# Altium PCB XEM7310_Breakout.PcbDoc (part 1 of 3)
Units mil, origin at the board's own origin, x right, y up, seen from the top; angles counter-clockwise.
Board outline 5980 x 6510 mil, 4 copper layers (Top, Ground Plane, Power Plane, Bottom), stack 61.497 mil thick; 68 components, 204 nets, 832 pads, 382 vias.
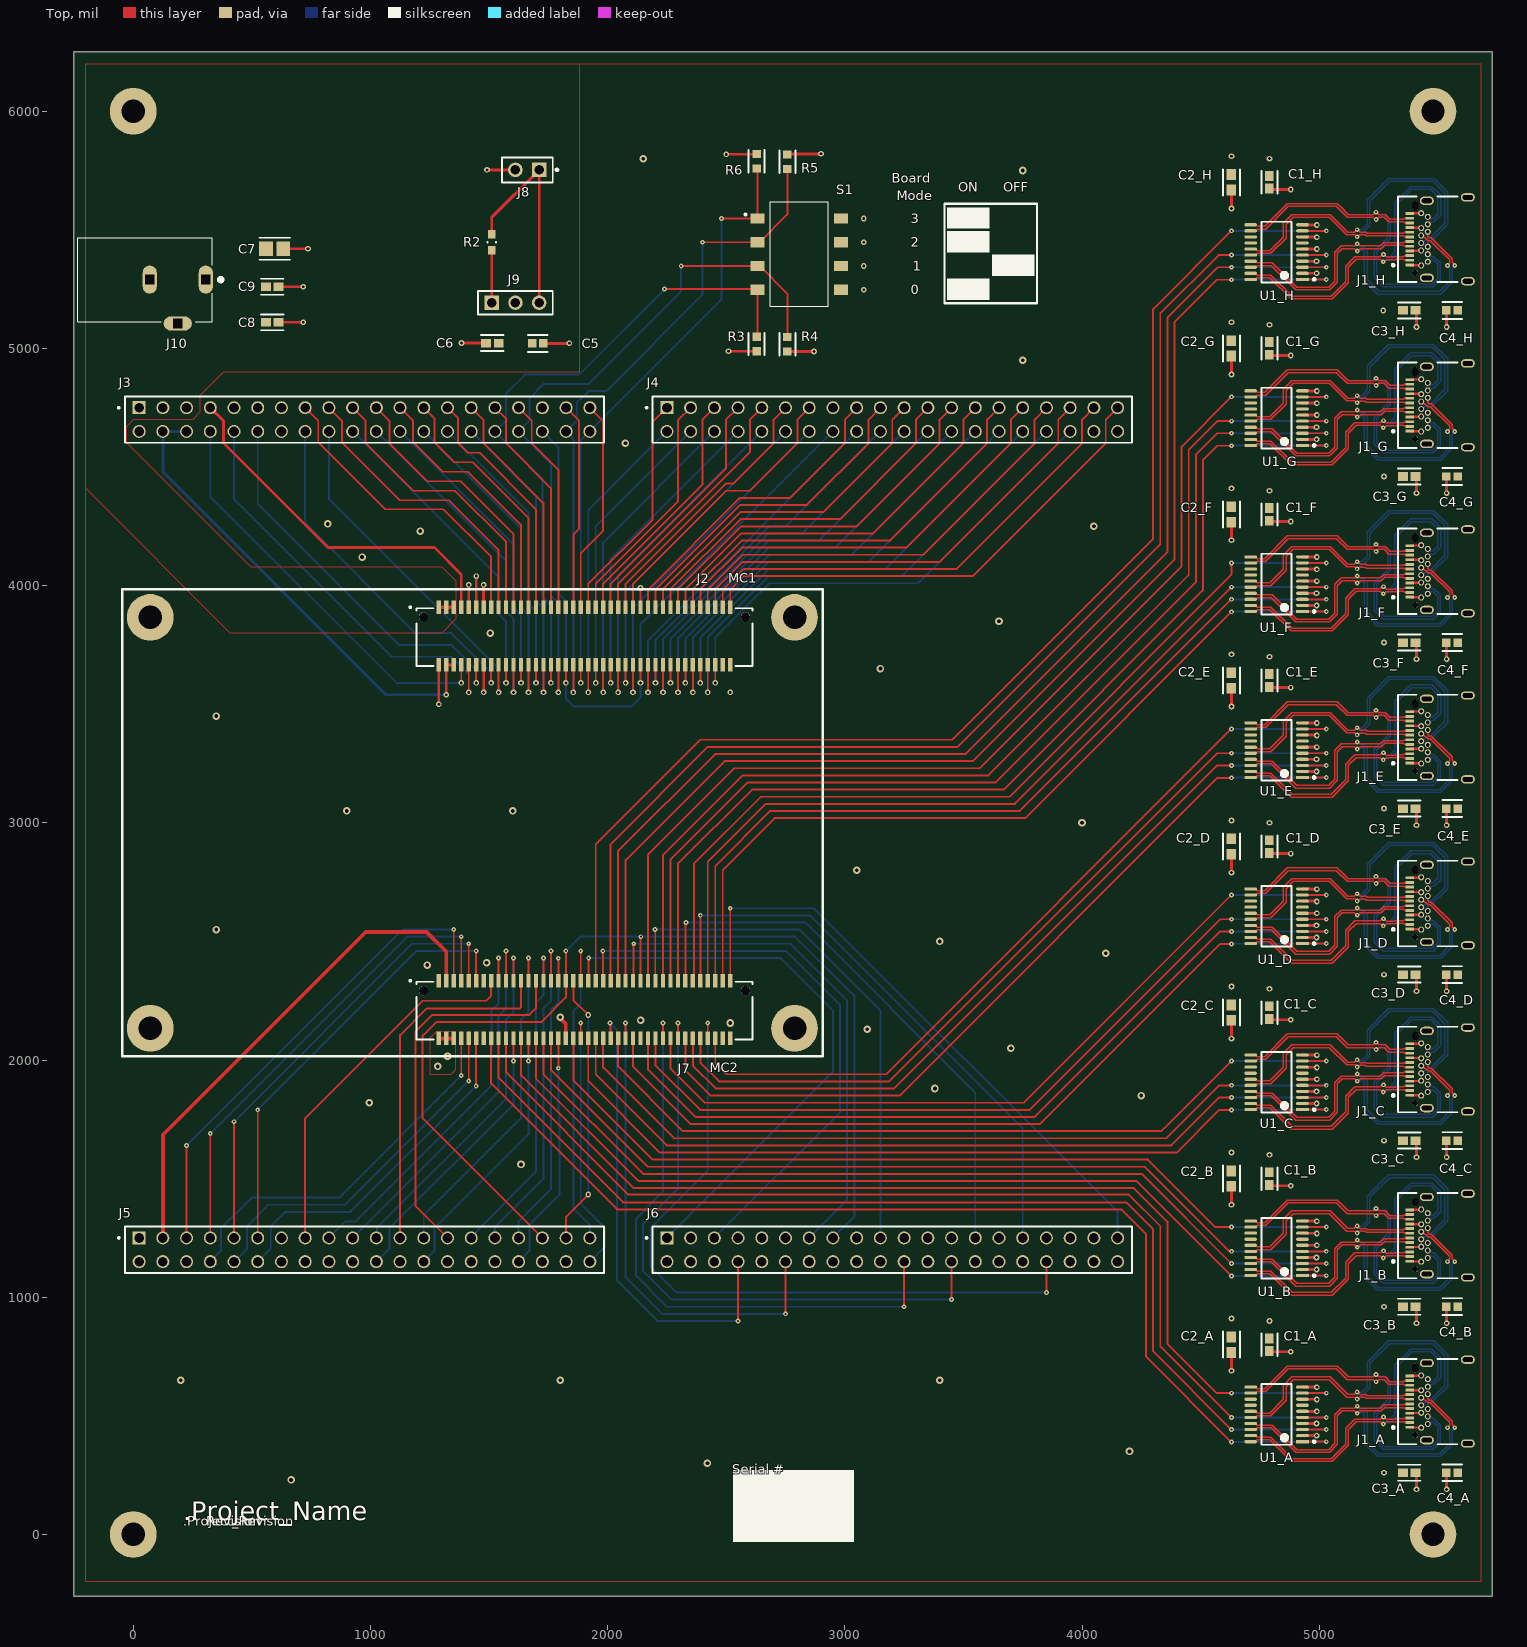
[diagram p0: Top view]
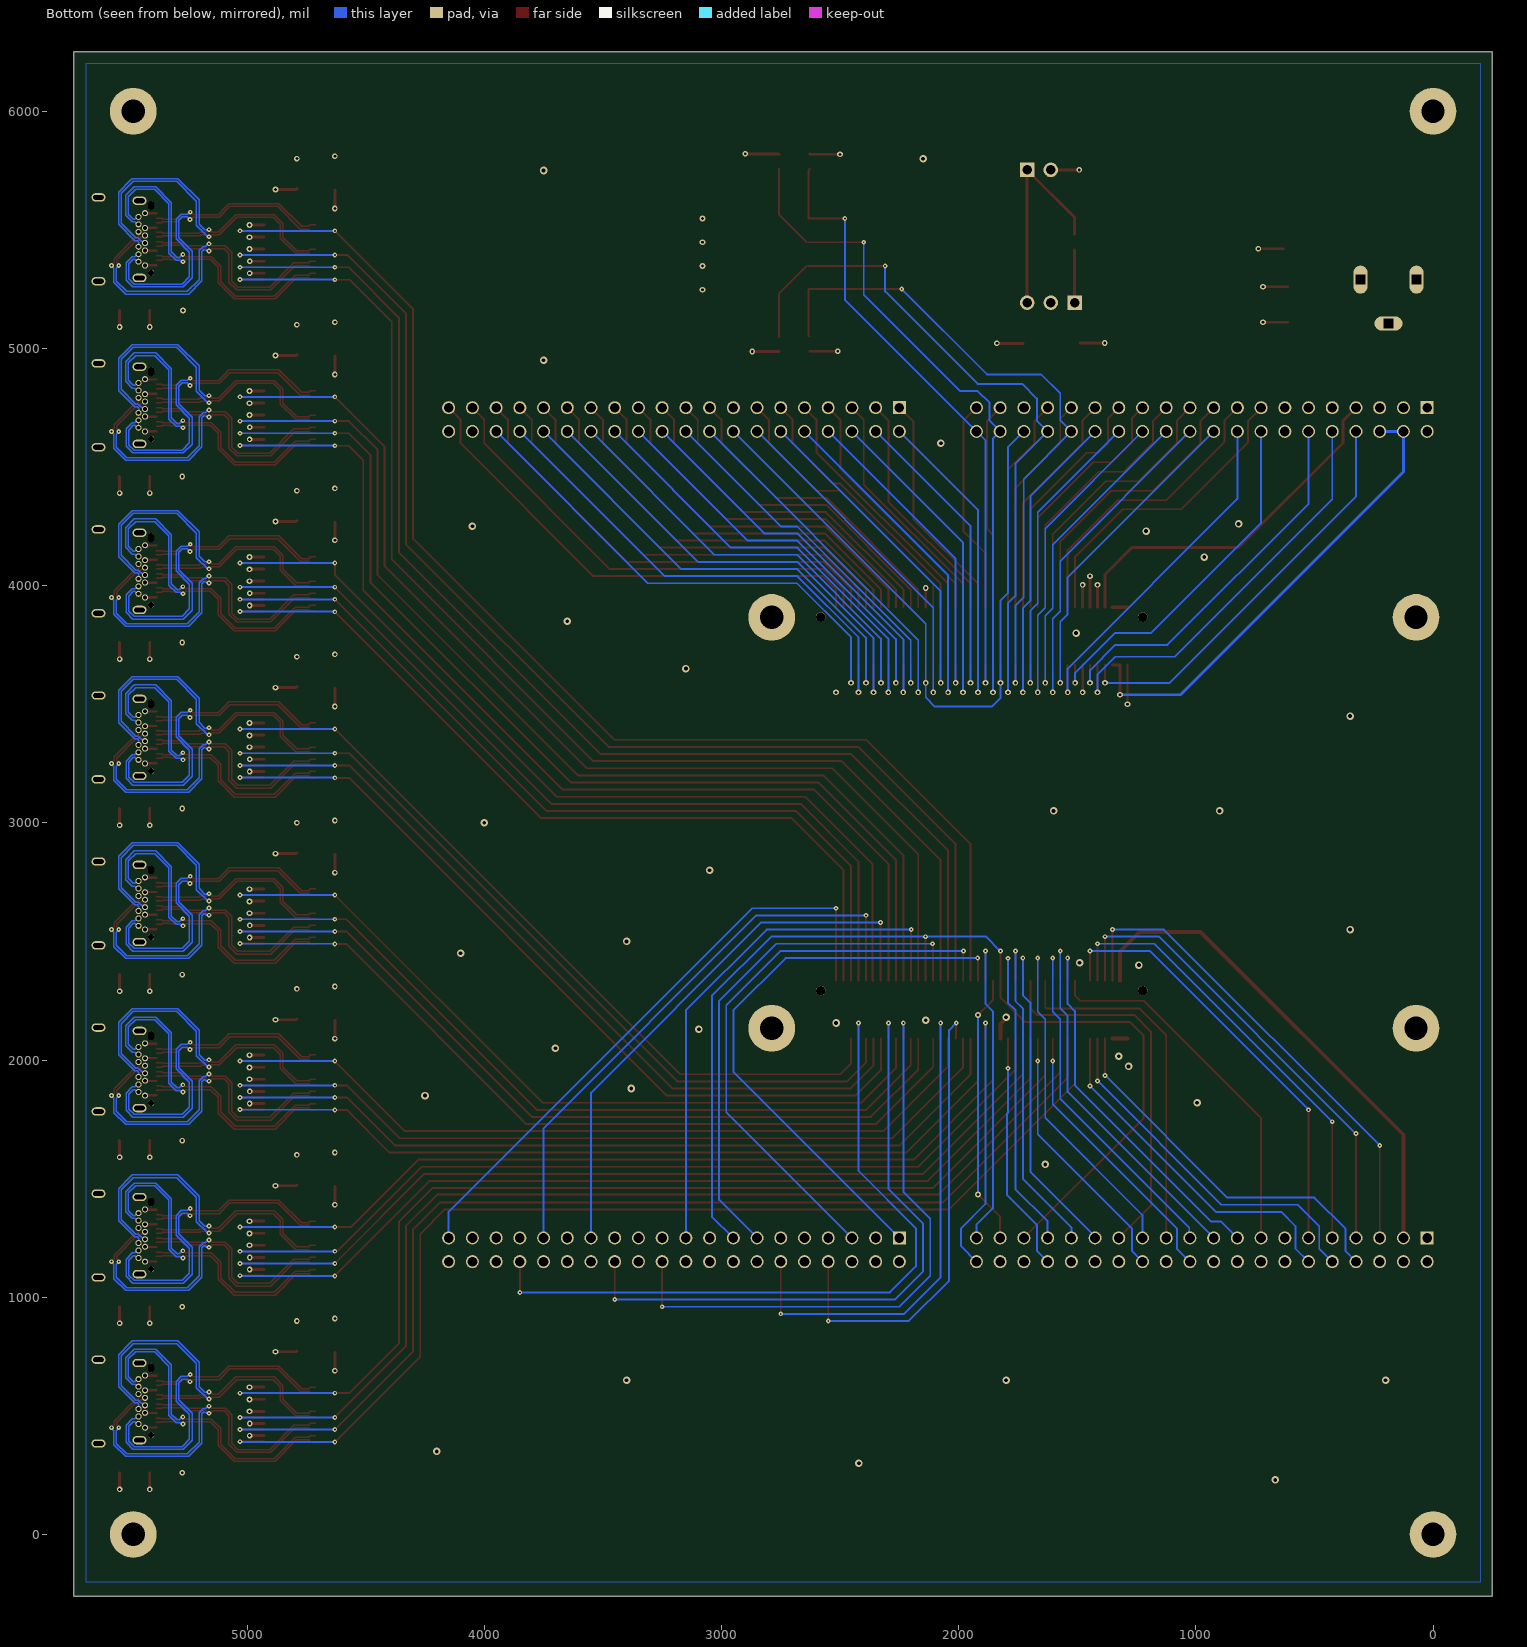
[diagram p1: Bottom view, seen from below]
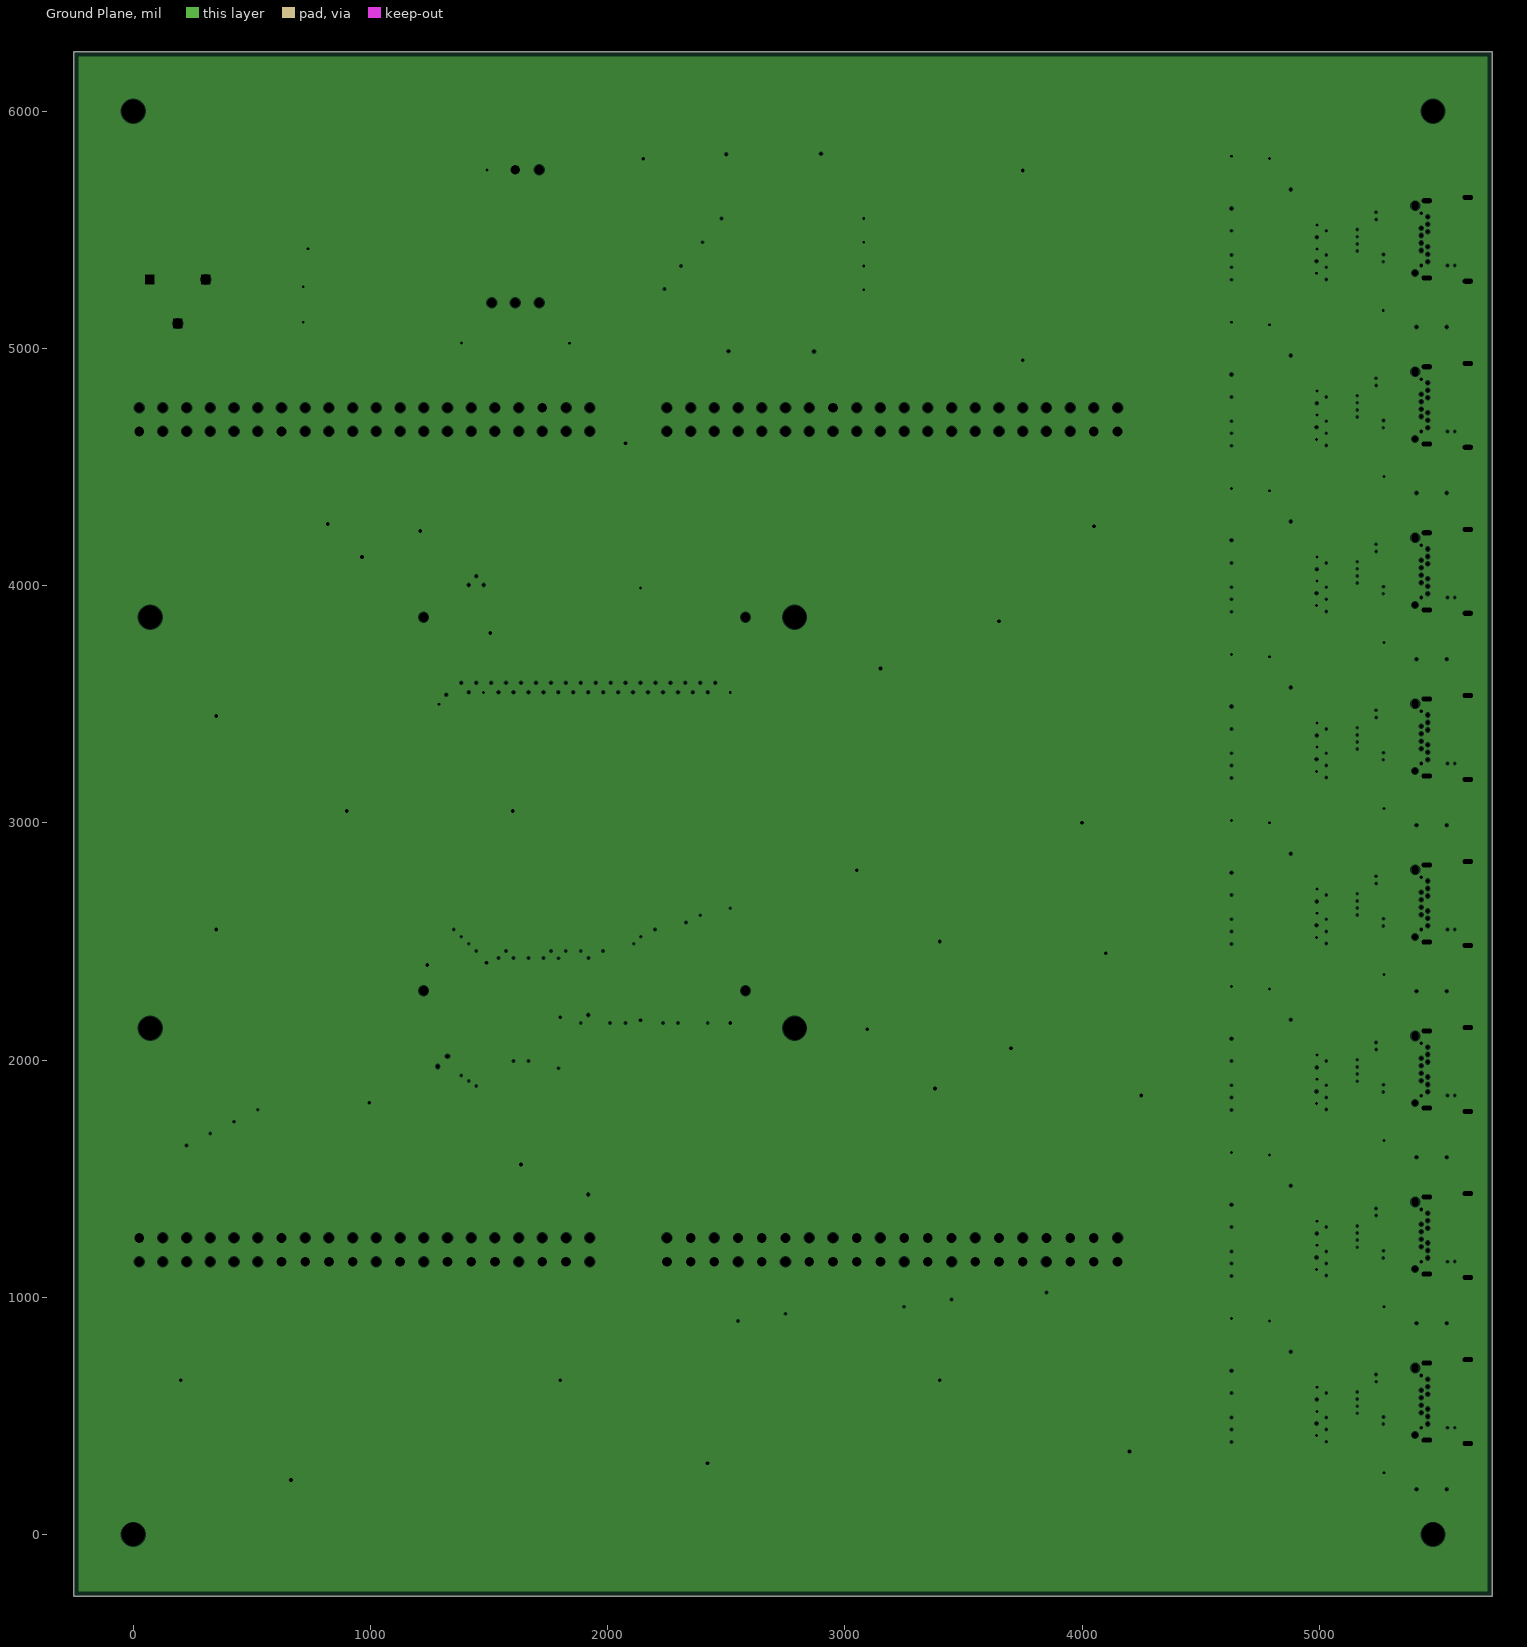
[diagram p2: Ground Plane, clearances drawn from the general rule]
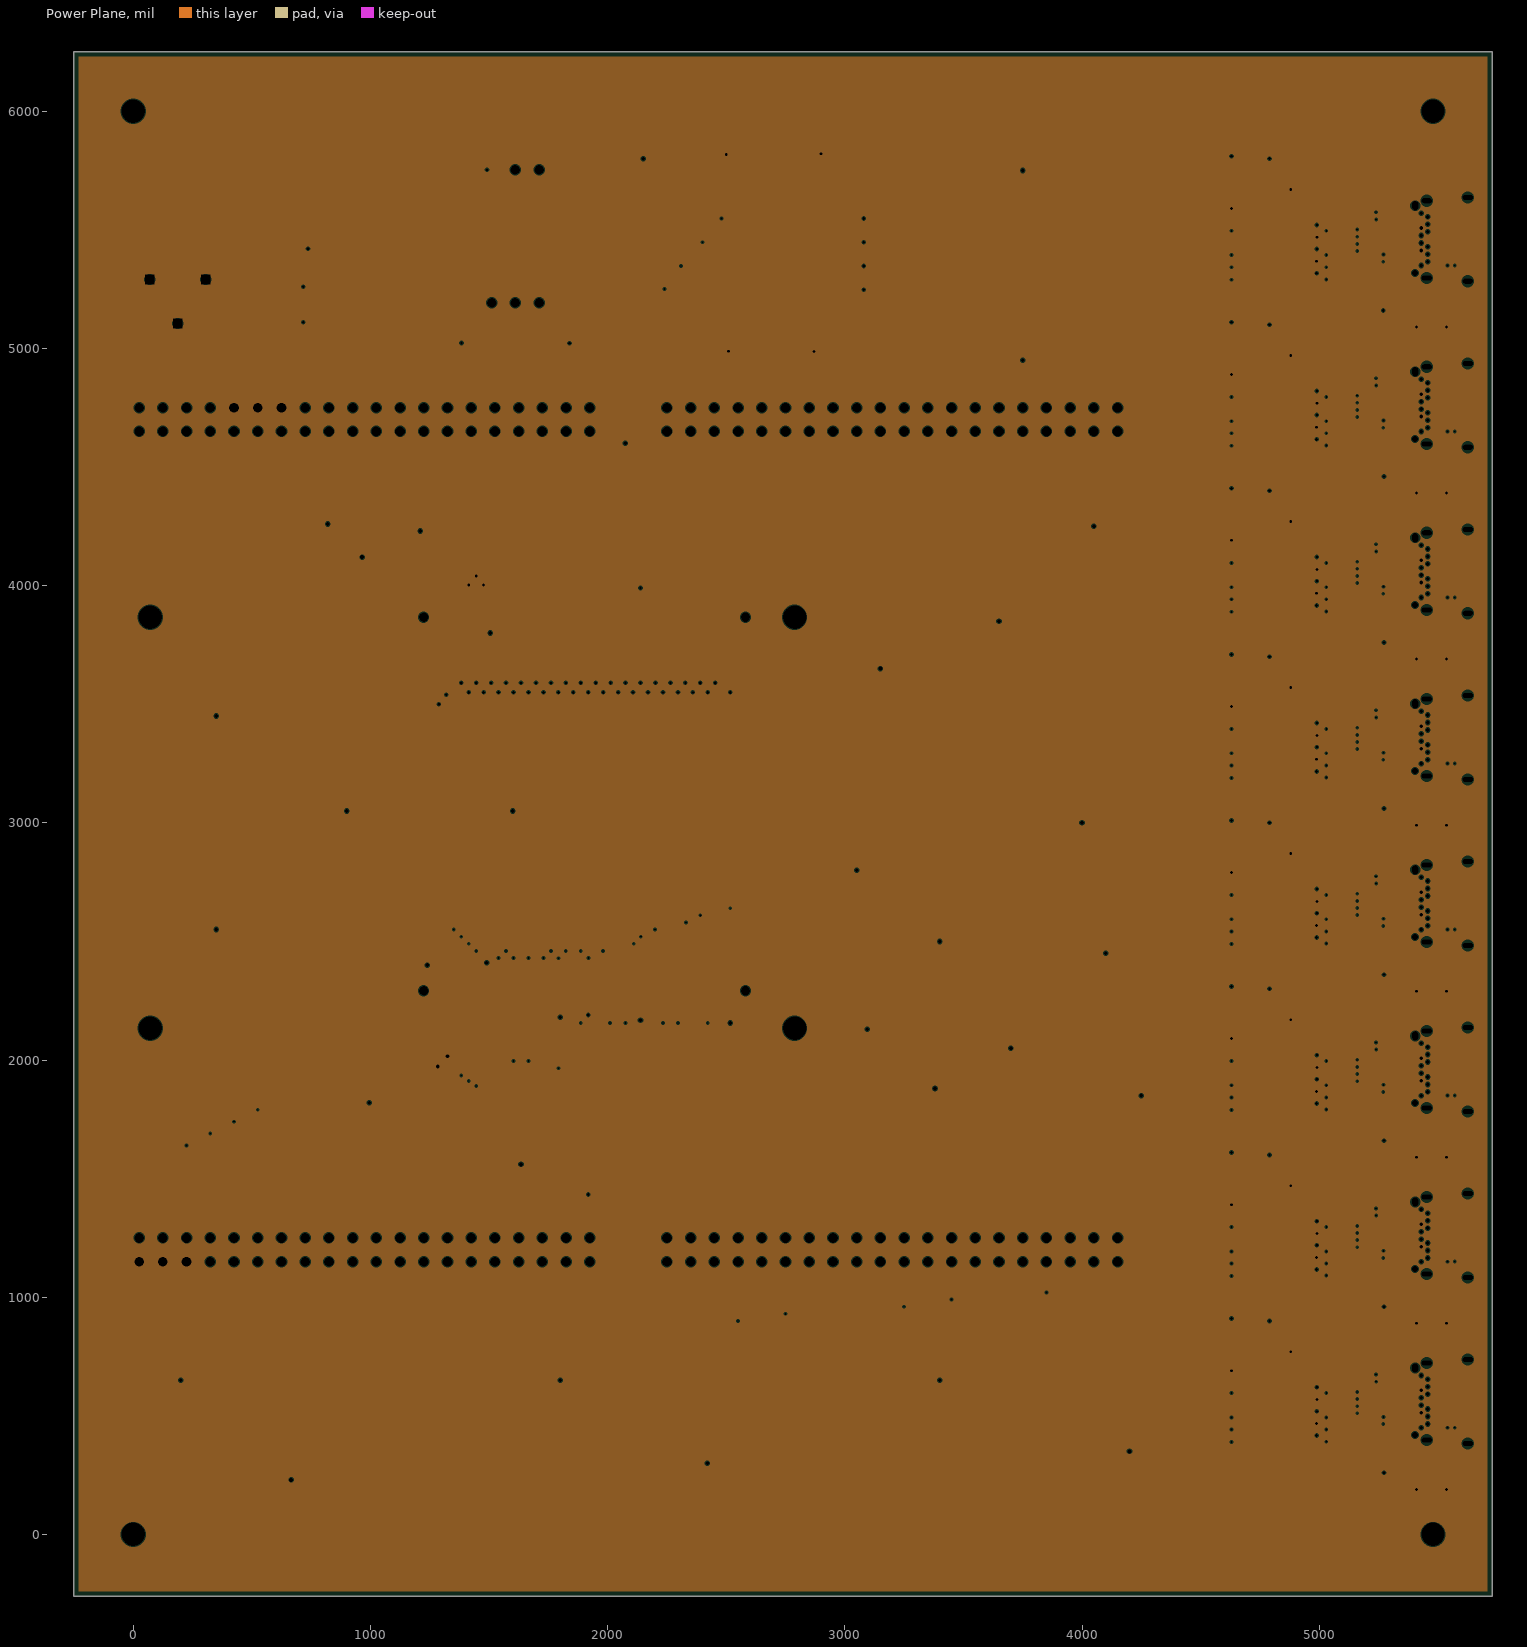
[diagram p3: Power Plane, clearances drawn from the general rule]
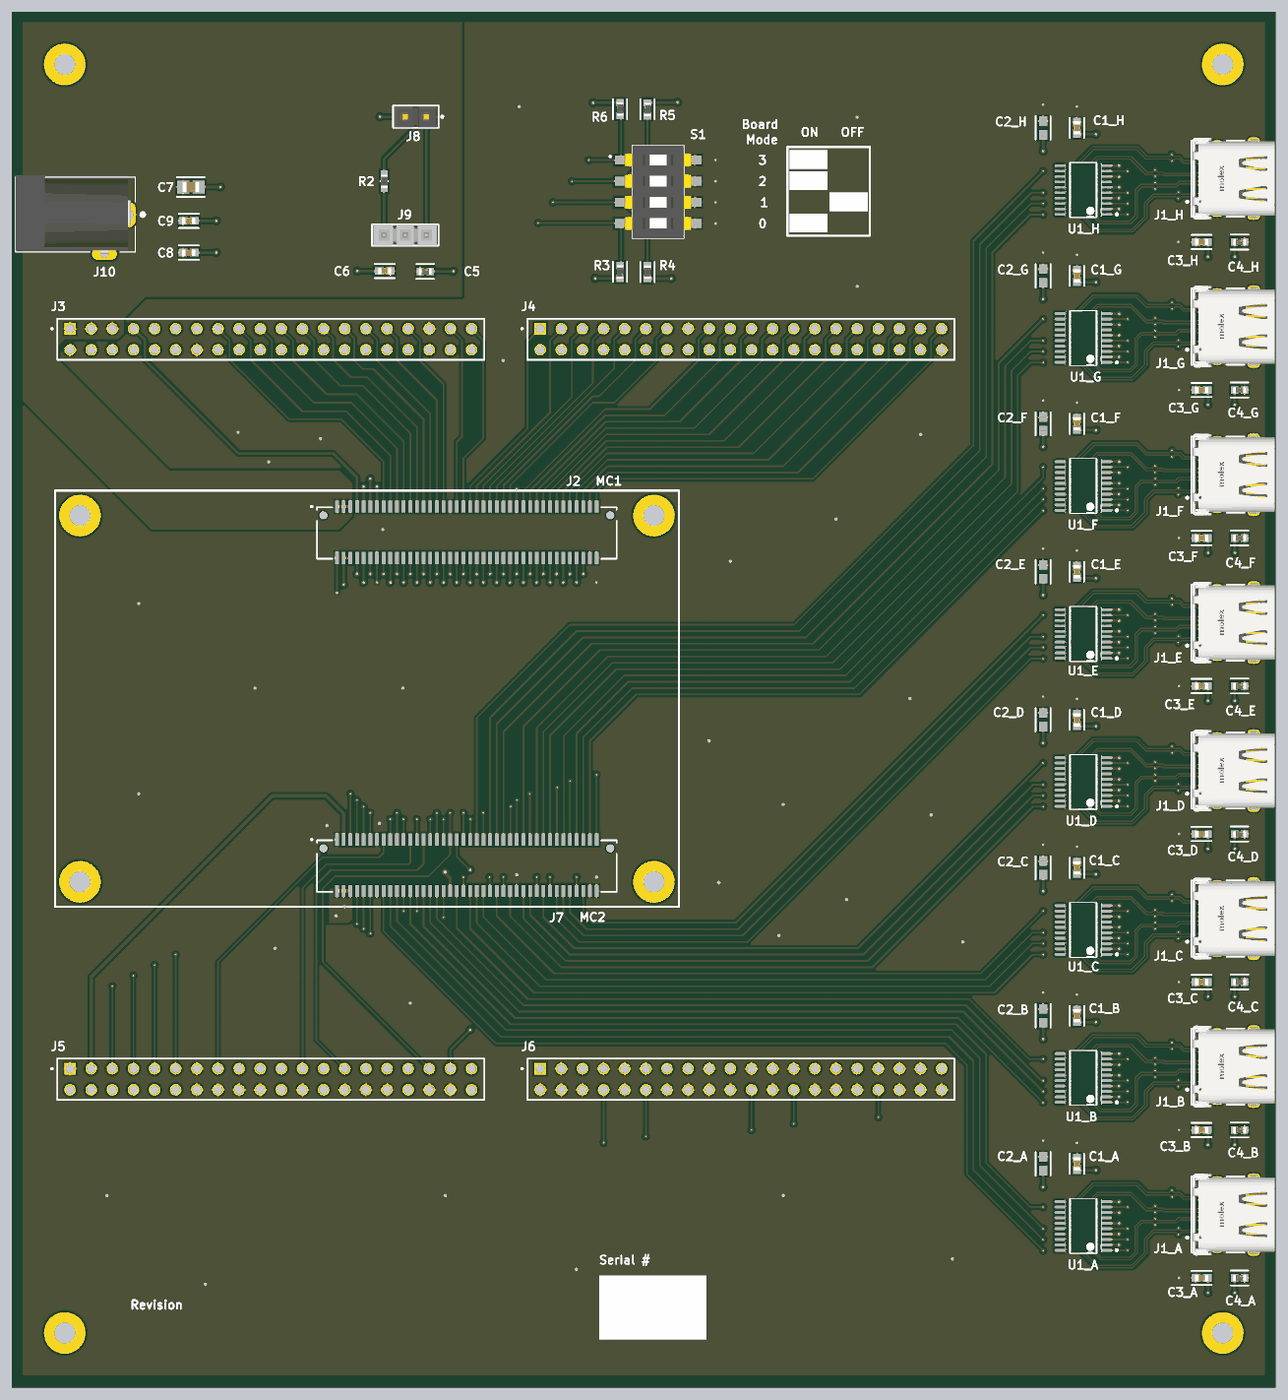
[diagram p6: 3D render of the assembled board from above, using the file's embedded part models]

## Layer stack, top to bottom
Top Solder: solder mask 0.4, Solder Resist, Dk 3.5
Top: signal copper 1.378
Dielectric 1: prepreg 7.717, FR-4, Dk 4.74
Ground Plane: plane copper 1.378, net GND
Dielectric 3: core 40.551, Dk 4.6
Power Plane: plane copper 1.378, net 3V3
Dielectric 4: prepreg 7.717, Dk 4.74
Bottom: signal copper 1.378
Bottom Solder: solder mask 0.4, Solder Resist, Dk 3.5

## Board outline
-250,6250 5730,6250 5730,-260 -250,-260

## Design rules (kind name [scope] priority, off if disabled: settings)
BoardOutlineClearance [All] p1: gap=7.87 ignorepadtopadclearanceinfootprint=FALSE
Clearance Clearance_1 [InComponentClass('USB') vs InComponentClass('USB')] p1: gap=4 ignorepadtopadclearanceinfootprint=TRUE
Clearance Diff_Clearance [InDifferentialPairClass('LVDS_SPI') vs InDifferentialPairClass('LVDS_SPI')] p2: gap=10 ignorepadtopadclearanceinfootprint=TRUE except(5: Arc-Arc Arc-Track Track-Track)
Clearance [All] p3: gap=6 ignorepadtopadclearanceinfootprint=TRUE except(10: Arc-Arc Arc-Track Arc-Fill Arc-Poly Arc-Region Track-Track Track-Fill Track-Poly Track-Region SMDPad-Fill SMDPad-Poly SMDPad-Region THPad-Fill THPad-Poly THPad-Region Via-Fill Via-Poly Via-Region Fill-Fill Fill-Poly Fill-Region Poly-Poly Poly-Region Region-Region)
ComponentClearance [All] p1: gap=10 collisioncheckmode=3 verticalgap=10 showdistances=TRUE
DiffPairsRouting [InDifferentialPairClass('LVDS_SPI')] p1: maxlimit=5 minlimit=5 mostfreqgap=5 toplayer_minwidth=6.3 toplayer_maxwidth=6.3 toplayer_prefwidth=6.3 bottomlayer_minwidth=6.3 bottomlayer_maxwidth=6.3 bottomlayer_prefwidth=6.3 impedanceprofiledriven=TRUE impedanceprofileid={1ED248B1-CE5C-4CD3-9082-4E048037D57D} impedanceprofilevalue=100.000000 maxuncoupledlength=30
Height [All] p1: minheight=0 maxheight=71497.94 prefheight=500
HoleSize [All] p1: absolutevalues=TRUE maxlimit=248.03 minlimit=7.87 maxpercent=80.000 minpercent=20.000
HoleToHoleClearance [All] p1: gap=10 allowstackedmicrovias=FALSE
Length [InDifferentialPairClass('LVDS_SPI')] p1: maxlimit=100000 minlimit=10
MinimumAnnularRing USB_TH [InComponentClass('USB')] p1: minimumring=4
MinimumAnnularRing [All] p2: minimumring=6
MinimumSolderMaskSliver MinimumSolderMaskSliver_1 [InComponentClass('USB') vs InComponentClass('USB')] p1: minsoldermaskwidth=5
MinimumSolderMaskSliver [All] p2: minsoldermaskwidth=6
PlaneClearance [All] p1: clearance=4
PlaneConnect PlaneConnectPowerPads [InPadClass('PowerPads')] p1: planeconnectstyle=Direct reliefexpansion=20 reliefentries=4 reliefconductorwidth=10 reliefairgap=10
PlaneConnect [All] p2: pad.planeconnectstyle=Relief pad.reliefexpansion=11.81 pad.reliefentries=4 pad.reliefconductorwidth=4 pad.reliefairgap=4 via.planeconnectstyle=Direct via.reliefexpansion=11.81 via.reliefentries=4 via.reliefconductorwidth=5 via.reliefairgap=5
PolygonConnect PolygonConnectPowerPads [All vs (InPadClass('PowerPads'))] p1: connectstyle=Direct reliefconductorwidth=10 reliefentries=4 polygonreliefangle="90 Angle" airgapwidth=10
PolygonConnect [All] p2: thpad.connectstyle=Relief thpad.reliefconductorwidth=10 thpad.reliefentries=4 thpad.polygonreliefangle="90 Angle" thpad.airgapwidth=8 smdpad.connectstyle=Relief smdpad.reliefconductorwidth=10 smdpad.reliefentries=4 smdpad.polygonreliefangle="90 Angle" smdpad.airgapwidth=8 via.connectstyle=Direct via.reliefconductorwidth=5 via.reliefentries=4 via.polygonreliefangle="90 Angle" via.airgapwidth=5
RoutingVias Diff_Vias [InDifferentialPairClass('LVDS_SPI')] p1: holewidth=8 width=18 viastyle="Through Hole" minholewidth=8 minwidth=18 maxholewidth=8 maxwidth=18
RoutingVias [All] p2: holewidth=12 width=24 viastyle="Through Hole" minholewidth=10 minwidth=20 maxholewidth=16 maxwidth=32
SilkToSilkClearance [All] p1: silktosilkclearance=5
SilkToSolderMaskClearance [IsPad] p1: minsilkscreentomaskgap=5 clearancetoexposedcopper=TRUE
SolderMaskExpansion [All] p1: expansion=2 istentingtop=FALSE
SupplyNets "Schematic Supply Nets_7" [InNet('1V0')] p1: voltage=0.000
SupplyNets "Schematic Supply Nets_6" [InNet('5V0')] p2: voltage=0.000
SupplyNets "Schematic Supply Nets_5" [InNet('VCCO_MC2')] p3: voltage=0.000
SupplyNets "Schematic Supply Nets_4" [InNet('VCCO_MC1')] p4: voltage=0.000
SupplyNets "Schematic Supply Nets_3" [InNet('1V8')] p5: voltage=0.000
SupplyNets "Schematic Supply Nets_2" [InNet('3V3')] p6: voltage=0.000
SupplyNets "Schematic Supply Nets_1" [InNet('GND')] p7: voltage=0.000
UnRoutedNet [All] p1: checkbadconnections=TRUE
Width 5V0_Width [InNet('5V0')] p1: maxlimit=100 minlimit=10 preferedwidth=20 minimp=50.000000 maximp=50.000000 favimp=50.000000
Width General [InNetClass('SE_Signals')] p2: maxlimit=20 minlimit=5 preferedwidth=8 minimp=50.000000 maximp=50.000000 favimp=50.000000
Width 3V3_Width [InNet('3V3')] p3: maxlimit=100 minlimit=10 preferedwidth=20
Width GND_Width [InNet('GND')] p4: maxlimit=100 minlimit=10 preferedwidth=20 minimp=50.000000 maximp=50.000000 favimp=50.000000
19 further rules are at their usual default settings.

## Classes and differential pairs
component class USB: J1_A J1_B J1_C J1_D J1_E J1_F J1_G J1_H
net class USB_TH: 3V3 C\S\_A_N C\S\_A_P C\S\_B_N C\S\_B_P C\S\_C_N C\S\_C_P C\S\_D_N C\S\_D_P C\S\_E_N C\S\_E_P C\S\_F_N C\S\_F_P C\S\_G_N C\S\_G_P C\S\_H_N C\S\_H_P GND MISO_A_N MISO_A_P MISO_B_N MISO_B_P MISO_C_N MISO_C_P MISO_D_N MISO_D_P MISO_E_N MISO_E_P MISO_F_N MISO_F_P MISO_G_N MISO_G_P MISO_H_N MISO_H_P MOSI_A_N MOSI_A_P MOSI_B_N MOSI_B_P MOSI_C_N MOSI_C_P MOSI_D_N MOSI_D_P MOSI_E_N MOSI_E_P MOSI_F_N MOSI_F_P MOSI_G_N MOSI_G_P MOSI_H_N MOSI_H_P SCLK_A_N SCLK_A_P SCLK_B_N SCLK_B_P SCLK_C_N SCLK_C_P SCLK_D_N SCLK_D_P SCLK_E_N SCLK_E_P SCLK_F_N SCLK_F_P SCLK_G_N SCLK_G_P SCLK_H_N SCLK_H_P
net class SE_Signals: board_mode_0 board_mode_1 board_mode_2 board_mode_3 C\S\_A C\S\_B C\S\_C C\S\_D C\S\_E C\S\_F C\S\_G C\S\_H FPGA_TCK FPGA_TDI FPGA_TDO FPGA_TMS MC1_15 MC1_16 MC1_17 MC1_18 MC1_19 MC1_20 MC1_21 MC1_22 MC1_23 MC1_24 MC1_25 MC1_26 MC1_27 MC1_28 MC1_29 MC1_30 MC1_31 MC1_33 MC1_37 MC1_39 MC1_41 MC1_42 MC1_43 MC1_44 MC1_45 MC1_46 MC1_47 MC1_48 MC1_49 MC1_50 MC1_51 MC1_52 MC1_53 MC1_54 MC1_57 MC1_58 MC1_59 MC1_60 MC1_61 MC1_62 MC1_63 MC1_64 MC1_65 MC1_66 MC1_67 MC1_68 MC1_69 MC1_70 MC1_72 MC1_74 MC1_76 MC1_77 MC1_79 MC2_10 MC2_12 MC2_15 MC2_17 MC2_19 MC2_21 MC2_22 MC2_23 MC2_25 MC2_27 MC2_29 MC2_31 MC2_33 MC2_34 MC2_37 MC2_39 MC2_45 MC2_48 MC2_59 MC2_62 MC2_71 MC2_74 MISO_A2 MISO_B2 MISO_C2 MISO_D2 MISO_E2 MISO_F2 MISO_G2 MISO_H2 MOSI_A MOSI_B MOSI_C MOSI_D MOSI_E MOSI_F MOSI_G MOSI_H NetJ8_1 NetJ9_1 SCLK_A SCLK_B SCLK_C SCLK_D SCLK_E SCLK_F SCLK_G SCLK_H status_led_1 status_led_2 status_led_3 SYS_CLK_MC1 SYS_CLK_MC2 XADC_VN XADC_VP
differential pair class LVDS_SPI: C\S\_A C\S\_B C\S\_C C\S\_D C\S\_E C\S\_F C\S\_G C\S\_H MISO_A MISO_B MISO_C MISO_D MISO_E MISO_F MISO_G MISO_H MOSI_A MOSI_B MOSI_C MOSI_D MOSI_E MOSI_F MOSI_G MOSI_H SCLK_A SCLK_B SCLK_C SCLK_D SCLK_E SCLK_F SCLK_G SCLK_H
channel class Intan_Interface: A B C D E F G H
component class U_Onboard_IO: C5 C6 C7 C8 C9 J8 J9 J10 R2 R3 R4 R5 R6 S1
component class U_FPGA: J2 J3 J4 J5 J6 J7
component class H: C1_H C2_H C3_H C4_H J1_H U1_H
component class G: C1_G C2_G C3_G C4_G J1_G U1_G
component class F: C1_F C2_F C3_F C4_F J1_F U1_F
component class E: C1_E C2_E C3_E C4_E J1_E U1_E
component class D: C1_D C2_D C3_D C4_D J1_D U1_D
component class C: C1_C C2_C C3_C C4_C J1_C U1_C
component class B: C1_B C2_B C3_B C4_B J1_B U1_B
component class A: C1_A C2_A C3_A C4_A J1_A U1_A
differential pair SCLK_H: +SCLK_H_P -SCLK_H_N
differential pair SCLK_G: +SCLK_G_P -SCLK_G_N
differential pair SCLK_F: +SCLK_F_P -SCLK_F_N
differential pair SCLK_E: +SCLK_E_P -SCLK_E_N
differential pair SCLK_D: +SCLK_D_P -SCLK_D_N
differential pair SCLK_C: +SCLK_C_P -SCLK_C_N
differential pair SCLK_B: +SCLK_B_P -SCLK_B_N
differential pair SCLK_A: +SCLK_A_P -SCLK_A_N
differential pair MOSI_H: +MOSI_H_P -MOSI_H_N
differential pair MOSI_G: +MOSI_G_P -MOSI_G_N
differential pair MOSI_F: +MOSI_F_P -MOSI_F_N
differential pair MOSI_E: +MOSI_E_P -MOSI_E_N
differential pair MOSI_D: +MOSI_D_P -MOSI_D_N
differential pair MOSI_C: +MOSI_C_P -MOSI_C_N
differential pair MOSI_B: +MOSI_B_P -MOSI_B_N
differential pair MOSI_A: +MOSI_A_P -MOSI_A_N
differential pair MISO_H: +MISO_H_P -MISO_H_N
differential pair MISO_G: +MISO_G_P -MISO_G_N
differential pair MISO_F: +MISO_F_P -MISO_F_N
differential pair MISO_E: +MISO_E_P -MISO_E_N
differential pair MISO_D: +MISO_D_P -MISO_D_N
differential pair MISO_C: +MISO_C_P -MISO_C_N
differential pair MISO_B: +MISO_B_P -MISO_B_N
differential pair MISO_A: +MISO_A_P -MISO_A_N
differential pair C\S\_H: +C\S\_H_P -C\S\_H_N
differential pair C\S\_G: +C\S\_G_P -C\S\_G_N
differential pair C\S\_F: +C\S\_F_P -C\S\_F_N
differential pair C\S\_E: +C\S\_E_P -C\S\_E_N
differential pair C\S\_D: +C\S\_D_P -C\S\_D_N
differential pair C\S\_C: +C\S\_C_P -C\S\_C_N
differential pair C\S\_B: +C\S\_B_P -C\S\_B_N
differential pair C\S\_A: +C\S\_A_P -C\S\_A_N

## Components (designator, comment, footprint, x,y, rotation, side; value= is the part's Value field where it differs from the comment)
C1_A "0.1uF" FP-CC0603-DA-IPC_B 4790,800 r90 top value="100 nF" (schematic designator C1)
C1_B "0.1uF" FP-CC0603-DA-IPC_B 4790,1500 r90 top value="100 nF" (schematic designator C1)
C1_C "0.1uF" FP-CC0603-DA-IPC_B 4790,2200 r90 top value="100 nF" (schematic designator C1)
C1_D "0.1uF" FP-CC0603-DA-IPC_B 4790,2900 r90 top value="100 nF" (schematic designator C1)
C1_E "0.1uF" FP-CC0603-DA-IPC_B 4790,3600 r90 top value="100 nF" (schematic designator C1)
C1_F "0.1uF" FP-CC0603-DA-IPC_B 4790,4300 r90 top value="100 nF" (schematic designator C1)
C1_G "0.1uF" FP-CC0603-DA-IPC_B 4790,5000 r90 top value="100 nF" (schematic designator C1)
C1_H "0.1uF" FP-CC0603-DA-IPC_B 4790,5700 r90 top value="100 nF" (schematic designator C1)
C2_A "1nF" FP-CL10-IPC_A 4630,800 r270 top (schematic designator C2)
C2_B "1nF" FP-CL10-IPC_A 4630,1500 r270 top (schematic designator C2)
C2_C "1nF" FP-CL10-IPC_A 4630,2200 r270 top (schematic designator C2)
C2_D "1nF" FP-CL10-IPC_A 4630,2900 r270 top (schematic designator C2)
C2_E "1nF" FP-CL10-IPC_A 4630,3600 r270 top (schematic designator C2)
C2_F "1nF" FP-CL10-IPC_A 4630,4300 r270 top (schematic designator C2)
C2_G "1nF" FP-CL10-IPC_A 4630,5000 r270 top (schematic designator C2)
C2_H "1nF" FP-CL10-IPC_A 4630,5700 r270 top (schematic designator C2)
C3_A "0.1uF" FP-CC0603-DA-IPC_B 5380,260 r180 top value="100 nF" (schematic designator C3)
C3_B "0.1uF" FP-CC0603-DA-IPC_B 5380,960 r180 top value="100 nF" (schematic designator C3)
C3_C "0.1uF" FP-CC0603-DA-IPC_B 5380,1660 r180 top value="100 nF" (schematic designator C3)
C3_D "0.1uF" FP-CC0603-DA-IPC_B 5380,2360 r180 top value="100 nF" (schematic designator C3)
C3_E "0.1uF" FP-CC0603-DA-IPC_B 5380,3060 r180 top value="100 nF" (schematic designator C3)
C3_F "0.1uF" FP-CC0603-DA-IPC_B 5380,3760 r180 top value="100 nF" (schematic designator C3)
C3_G "0.1uF" FP-CC0603-DA-IPC_B 5380,4460 r180 top value="100 nF" (schematic designator C3)
C3_H "0.1uF" FP-CC0603-DA-IPC_B 5380,5160 r180 top value="100 nF" (schematic designator C3)
C4_A "10 uF" FP-GRM188-0_2-IPC_C 5560,260 r0 top (schematic designator C4)
C4_B "10 uF" FP-GRM188-0_2-IPC_C 5560,960 r0 top (schematic designator C4)
C4_C "10 uF" FP-GRM188-0_2-IPC_C 5560,1660 r0 top (schematic designator C4)
C4_D "10 uF" FP-GRM188-0_2-IPC_C 5560,2360 r0 top (schematic designator C4)
C4_E "10 uF" FP-GRM188-0_2-IPC_C 5560,3060 r0 top (schematic designator C4)
C4_F "10 uF" FP-GRM188-0_2-IPC_C 5560,3760 r0 top (schematic designator C4)
C4_G "10 uF" FP-GRM188-0_2-IPC_C 5560,4460 r0 top (schematic designator C4)
C4_H "10 uF" FP-GRM188-0_2-IPC_C 5560,5160 r0 top (schematic designator C4)
C5 "10 uF" FP-GRM188-0_2-IPC_C 1705.81,5020.81 r0 top
C6 "0.1uF" FP-CC0603-DA-IPC_B 1514.16,5022.51 r180 top value="100 nF"
C7 "22uF" FP-GRM21B-0_2-e0_2_0_7-IPC_A 596.45,5420 r0 top
C8 "1uF" FP-CC0603-DA-IPC_B 586.65,5110 r0 top value="1 uF"
C9 "0.1uF" FP-CC0603-DA-IPC_B 586.65,5260 r0 top value="100 nF"
J1_A "217183-0001" FP-217183-0001-MFG 5531.81,560 r90 top locked (schematic designator J1)
J1_B "217183-0001" FP-217183-0001-MFG 5531.81,1260 r90 top locked (schematic designator J1)
J1_C "217183-0001" FP-217183-0001-MFG 5531.81,1960 r90 top locked (schematic designator J1)
J1_D "217183-0001" FP-217183-0001-MFG 5531.81,2660 r90 top locked (schematic designator J1)
J1_E "217183-0001" FP-217183-0001-MFG 5531.81,3360 r90 top locked (schematic designator J1)
J1_F "217183-0001" FP-217183-0001-MFG 5531.81,4060 r90 top locked (schematic designator J1)
J1_G "217183-0001" FP-217183-0001-MFG 5531.81,4760 r90 top locked (schematic designator J1)
J1_H "217183-0001" FP-217183-0001-MFG 5531.81,5460 r90 top locked (schematic designator J1)
J2 "BTE-040-01-F-D-A" SAMTEC_BTE-040-01-F-D-A 1902.64,3787.32 r0 top locked
J3 "SSW-120-01-F-D" SAMTEC_SSW-120-01-F-D 25,4750 r180 top locked
J4 "SSW-120-01-F-D" SAMTEC_SSW-120-01-F-D 2250,4750 r180 top
J5 "SSW-120-01-F-D" SAMTEC_SSW-120-01-F-D 25,1250 r180 top locked
J6 "SSW-120-01-F-D" SAMTEC_SSW-120-01-F-D 2250,1250 r180 top locked
J7 "BTE-040-01-F-D-A" SAMTEC_BTE-040-01-F-D-A 1902.64,2212.52 r0 top locked
J8 "TSW-102-07-F-S" FP-TSW-102-07-F-S-MFG 1661.49,5752.67 r180 top
J9 "TSW-103-07-F-S" SMTC-TSW-103-07-X-S 1511.49,5192.67 r0 top
J10 "PJ-102AH" CUI_PJ-102AH 50,5290 r180 top
R2 "0R" FP-RC0603-MFG 1511.49,5447.67 r90 top value=0Ω
R3 "10K0" FP-RC0603-0_55-IPC_B 2627.82,5018.61 r270 top
R4 "10K0" FP-RC0603-0_55-IPC_B 2757.82,5017.6 r270 top
R5 "10K0" FP-RC0603-0_55-IPC_B 2757.82,5787.6 r90 top
R6 "10K0" FP-RC0603-0_55-IPC_B 2627.82,5788.61 r90 top
S1 "DS04-254-2-04BK-SMT-TR" SW_DS04-254-2-04BK-SMT-TR 2807.82,5397.6 r0 top
U1_A "SN65LVDT41PW" FP-PW0020A-IPC_C 4820,506.12 r180 top (schematic designator U1)
U1_B "SN65LVDT41PW" FP-PW0020A-IPC_C 4820,1206.12 r180 top locked (schematic designator U1)
U1_C "SN65LVDT41PW" FP-PW0020A-IPC_C 4820,1906.12 r180 top locked (schematic designator U1)
U1_D "SN65LVDT41PW" FP-PW0020A-IPC_C 4820,2606.12 r180 top locked (schematic designator U1)
U1_E "SN65LVDT41PW" FP-PW0020A-IPC_C 4820,3306.12 r180 top locked (schematic designator U1)
U1_F "SN65LVDT41PW" FP-PW0020A-IPC_C 4820,4006.12 r180 top locked (schematic designator U1)
U1_G "SN65LVDT41PW" FP-PW0020A-IPC_C 4820,4706.12 r180 top locked (schematic designator U1)
U1_H "SN65LVDT41PW" FP-PW0020A-IPC_C 4820,5406.12 r180 top locked (schematic designator U1)

## Footprints (in the part's own frame and the unit in brackets; to place one, negate y for a bottom-side part, rotate by r counter-clockwise, add the part's x,y. Pads: shape width x height; smd on the part's side, far side on the other; paste and mask are expansions set on the pad)
CUI_PJ-102AH [mm]
  oval 1.508x3.016 hole 1 square: 1(-6.5,0) 2(-0.5,0)
  oval 3.016x1.508 hole 1 square: 3(-3.5,4.7)
  silkscreen extent -8.3,-4.5 7.2,4.5, body extent -7.2,-4.7 7.2,4.7, height 4.5
FP-217183-0001-MFG [mm]
  rrect100% 0.9x1.5 hole 1.1 slot 0.5 at 0 deg paste-2539.97 mask+0: 1(-4.13,1.985) 2(4.13,1.985) 3(-4.49,-2.405) 4(4.49,-2.405)
  rect 0.3x0.9 smd paste+0 mask+0.025: A1(-2.75,3.795) A2(-2.25,3.795) A3(-1.75,3.795) A4(-1.25,3.795) A5(-0.75,3.795) A6(-0.25,3.795) A7(0.25,3.795) A8(0.75,3.795) A9(1.25,3.795) A10(1.75,3.795) A11(2.25,3.795) A12(2.75,3.795)
  round 0.65 hole 0.4 paste-2539.97 mask+0: B1(2.8,2.585) B2(2.4,1.885) B3(1.6,1.885) B4(1.2,2.585) B5(0.8,1.885) B6(0.4,2.585) B7(-0.4,2.585) B8(-0.8,1.885) B9(-1.2,2.585) B10(-1.6,1.885) B11(-2.4,1.885) B12(-2.8,2.585)
  round 0.65 hole 0.65 unplated paste-2539.97 mask+0: ""(-3.6,3.235)
  rrect100% 0.95x0.65 hole 0.65 slot 0.95 at 0 deg unplated paste-2539.97 mask+0: ""(3.6,3.235)
  silkscreen extent -4.57,-1.28 4.57,5.71, body extent -5.04,-5.19 5.04,5.19, height 0.25
FP-CC0603-DA-IPC_B [mil]
  rect 41.66x35.91 smd paste+0: 1(-26.65,0) 2(26.65,0)
  silkscreen extent -47,-34 47,34, body extent -57,-28 57,28, height 10
FP-CL10-IPC_A [mil]
  rect 45.6x39.85 smd paste+0: 1(-32.56,0) 2(32.56,0)
  silkscreen extent -55,-36 55,36, body extent -75,-40 75,40, height 10
FP-GRM21B-0_2-e0_2_0_7-IPC_A [mil]
  rect 57.27x61.27 smd paste+0: 1(-36.45,0) 2(36.45,0)
  silkscreen extent -65,-46 65,46, body extent -85,-50 85,50, height 10
FP-GRM188-0_2-IPC_C [mil]
  rect 35.63x35.68 smd paste+0: 1(-23.64,0) 2(23.64,0)
  silkscreen extent -41,-35 41,35, body extent -45,-24 45,24, height 10
FP-PW0020A-IPC_C [mm]
  rect 1.355x0.341 smd paste+0: 1(-2.775,2.925)
  rrect100% 1.355x0.341 smd paste+0: 2(-2.775,2.275) 3(-2.775,1.625) 4(-2.775,0.975) 5(-2.775,0.325) 6(-2.775,-0.325) 7(-2.775,-0.975) 8(-2.775,-1.625) 9(-2.775,-2.275) 10(-2.775,-2.925) 11(2.775,-2.925) 12(2.775,-2.275) 13(2.775,-1.625) 14(2.775,-0.975) 15(2.775,-0.325) 16(2.775,0.325) 17(2.775,0.975) 18(2.775,1.625) 19(2.775,2.275) 20(2.775,2.925)
  silkscreen extent -4.15,-3.25 1.6,3.25, body extent -3.55,-3.35 3.55,3.35, height 0.25
FP-RC0603-0_55-IPC_B [mil]
  rect 33.81x35.91 smd paste+0: 1(-30.58,0) 2(30.58,0)
  silkscreen extent -47,-34 47,34, body extent -57,-28 57,28, height 10
FP-RC0603-MFG [mm]
  rect 0.9x0.8 smd paste+0: 1(-0.85,0) 2(0.85,0)
  silkscreen extent -0.03,-0.45 0.03,0.45, body extent -1.4,-0.55 1.4,0.55, height 0.25
FP-TSW-102-07-F-S-MFG [mm]
  rect 1.57x1.57 hole 1.02 paste-2539.97 mask+0: 1(-1.27,0)
  round 1.57 hole 1.02 paste-2539.97 mask+0: 2(1.27,0)
  silkscreen extent -3.3,-1.34 2.73,1.34, body extent -2.83,-1.44 2.83,1.44, height 0.25
SAMTEC_BTE-040-01-F-D-A [mm]
  rect 0.457x1.44 smd: 01(-15.6,3.086) 02(-15.6,-3.086) 03(-14.8,3.086) 04(-14.8,-3.086) 05(-14,3.086) 06(-14,-3.086) 07(-13.2,3.086) 08(-13.2,-3.086) 09(-12.4,3.086) 10(-12.4,-3.086) 11(-11.6,3.086) 12(-11.6,-3.086) 13(-10.8,3.086) 14(-10.8,-3.086) 15(-10,3.086) 16(-10,-3.086) 17(-9.2,3.086) 18(-9.2,-3.086) 19(-8.4,3.086) 20(-8.4,-3.086) 21(-7.6,3.086) 22(-7.6,-3.086) 23(-6.8,3.086) 24(-6.8,-3.086) 25(-6,3.086) 26(-6,-3.086) 27(-5.2,3.086) 28(-5.2,-3.086) 29(-4.4,3.086) 30(-4.4,-3.086) 31(-3.6,3.086) 32(-3.6,-3.086) 33(-2.8,3.086) 34(-2.8,-3.086) 35(-2,3.086) 36(-2,-3.086) 37(-1.2,3.086) 38(-1.2,-3.086) 39(-0.4,3.086) 40(-0.4,-3.086) 41(0.4,3.086) 42(0.4,-3.086) 43(1.2,3.086) 44(1.2,-3.086) 45(2,3.086) 46(2,-3.086) 47(2.8,3.086) 48(2.8,-3.086) 49(3.6,3.086) 50(3.6,-3.086) 51(4.4,3.086) 52(4.4,-3.086) 53(5.2,3.086) 54(5.2,-3.086) 55(6,3.086) 56(6,-3.086) 57(6.8,3.086) 58(6.8,-3.086) 59(7.6,3.086) 60(7.6,-3.086) 61(8.4,3.086) 62(8.4,-3.086) 63(9.2,3.086) 64(9.2,-3.086) 65(10,3.086) 66(10,-3.086) 67(10.8,3.086) 68(10.8,-3.086) 69(11.6,3.086) 70(11.6,-3.086) 71(12.4,3.086) 72(12.4,-3.086) 73(13.2,3.086) 74(13.2,-3.086) 75(14,3.086) 76(14,-3.086) 77(14.8,3.086) 78(14.8,-3.086) 79(15.6,3.086) 80(15.6,-3.086)
  round 1.016 hole 1.016 unplated: ""(-17.238,2.032) ""(17.238,2.032)
  silkscreen extent -18.75,-3.19 18,3.19
SAMTEC_SSW-120-01-F-D [mm]
  rect 1.39x1.39 hole 1.04: 01(0,0)
  round 1.39 hole 1.04: 02(0,2.54) 03(-2.54,0) 04(-2.54,2.54) 05(-5.08,0) 06(-5.08,2.54) 07(-7.62,0) 08(-7.62,2.54) 09(-10.16,0) 10(-10.16,2.54) 11(-12.7,0) 12(-12.7,2.54) 13(-15.24,0) 14(-15.24,2.54) 15(-17.78,0) 16(-17.78,2.54) 17(-20.32,0) 18(-20.32,2.54) 19(-22.86,0) 20(-22.86,2.54) 21(-25.4,0) 22(-25.4,2.54) 23(-27.94,0) 24(-27.94,2.54) 25(-30.48,0) 26(-30.48,2.54) 27(-33.02,0) 28(-33.02,2.54) 29(-35.56,0) 30(-35.56,2.54) 31(-38.1,0) 32(-38.1,2.54) 33(-40.64,0) 34(-40.64,2.54) 35(-43.18,0) 36(-43.18,2.54) 37(-45.72,0) 38(-45.72,2.54) 39(-48.26,0) 40(-48.26,2.54)
  silkscreen extent -49.79,-1.21 2.27,3.75
SMTC-TSW-103-07-X-S [mm] ".025 SQ Post Terminal Strip Assembly, 1x3 Pins, Vertical, 2.54mm Pitch, Male"
  rect 1.55x1.55 hole 1.02: 1(0,0)
  round 1.55 hole 1.02: 2(2.54,0) 3(5.08,0)
  silkscreen extent -1.46,-1.27 6.54,1.27, body extent -1.27,-1.27 6.35,1.27, height 8.38
SW_DS04-254-2-04BK-SMT-TR [mm]
  rect 1.5x1.1 smd: 1A(-4.45,3.81) 1B(4.45,3.81) 2A(-4.45,1.27) 2B(4.45,1.27) 3A(-4.45,-1.27) 3B(4.45,-1.27) 4A(-4.45,-3.81) 4B(4.45,-3.81)
  silkscreen extent -5.85,-5.58 3.1,5.58, body extent -4.95,-5.57 4.95,5.59, height 3.09

## Part data
C1_A C1_B C1_C C1_D C1_E C1_F C1_G C1_H C3_A C3_B C3_C C3_D C3_E C3_F C3_G C3_H C6 C9: library part CAP_0U10_0603, "CAP CER 0.1UF 50V X7R 0603", Capacitance="100 nF", Manufacturer=YAGEO, Manufacturer Part Number=CC0603KRX7R9BB104, Package=CC0603-DA, Temperature="-55°C to +125°C", Temperature Characteristic=X7R, Temperature Coefficient=15%, Temperature Range High=+125°C, Temperature Range Low=-55°C, Tolerance=0.1, Voltage="50 V", Automotive=No, Category=Cap, ComponentLink2Description=Datasheet, ComponentLink2URL=http://www.yageo.com/documents/recent/UPY-GPHC_X7R_6.3V-to-50V_18.pdf, Device Class L1="Passive Components", Device Class L2=Capacitors, Device Class L3="Ceramic Capacitors", Digikey Description="CAP CER 0.1UF 50V X7R 0603", Footprint Url=http://www.yageo.com/exep/pages/download/literatures/UPY-C_GEN_24.pdf, Height=0.9mm, Lead Free=Yes, Material=Ceramic, Mouser Description="Multilayer Ceramic Capacitor, CC Series, 0.1 - F, - 10%, X7R, 50 V, 0603 [1608 Metric]", Octopart=https://octopart.com/cc0603krx7r9bb104-yageo-42244635, RoHS=TRUE, Voltage Rating="50 V"
C2_A C2_B C2_C C2_D C2_E C2_F C2_G C2_H: library part CAP_1N00_0603, "Cap Ceramic 1nF 50V X7R ±10% Pad SMD 0603 +125°C T/R", Case Code (Imperial)=0603, Case Code (Metric)=1608, Dielectric=X7R, Max Operating Temperature=125°C, Min Operating Temperature=-55°C, Package Quantity=1, Tolerance=10%, Voltage=50V, Capacitance=1nF, Case/Package=0603, Contact Plating=Tin, Depth=0.8mm, Height=0.8mm, Lead Free="Lead Free", Length=1.6mm, Material=Ceramic, Mount="Surface Mount", Packaging="Tape and Reel", Radiation Hardening=No, Thickness=0.035inch, Voltage Rating=50V, Voltage Rating (DC)=50V, Width=0.031inch
C4_A C4_B C4_C C4_D C4_E C4_F C4_G C4_H C5: library part CAP_10U0_0603, "Chip Multilayer Ceramic Capacitors for General Purpose, 0603, 10uF, X7R, 15%, 10%, 10V"
C7: library part CAP_22U0_0805, "Chip Multilayer Ceramic Capacitors for General Purpose, 0805, 22uF, X6S, 22%, 20%, 16V", Case Code (Imperial)=0805, Case Code (Metric)=2012, Dielectric=X6S, Max Operating Temperature=105°C, Min Operating Temperature=-55°C, Package Quantity=3000, Tolerance=20%, Voltage Rating=16V, Capacitance=22uF, Case/Package=0805, Height=1.25mm, Lead Free="Lead Free", Length=0.079inch, Mount="Surface Mount", Packaging="Tape and Reel", Termination=SMD/SMT, Thickness=0.057inch, Voltage Rating (DC)=16V, Weight=0.000335oz, Width=1.25mm
C8: library part CAP_1U00_0603, "CAP CER 1UF 16V X7R 0603", Capacitance="1 uF", Manufacturer=YAGEO, Manufacturer Part Number=CC0603KRX7R7BB105, Package=CC0603-DA, Temperature="-55°C to +125°C", Temperature Characteristic=X7R, Temperature Coefficient=15%, Temperature Range High=+125°C, Temperature Range Low=-55°C, Tolerance=0.1, Voltage="16 V", Automotive=No, Category=Cap, ComponentLink2Description=Datasheet, ComponentLink2URL=http://www.yageo.com/documents/recent/UPY-GPHC_X7R_6.3V-to-50V_18.pdf, Device Class L1="Passive Components", Device Class L2=Capacitors, Device Class L3="Ceramic Capacitors", Digikey Description="CAP CER 1UF 16V X7R 0603", Footprint Url=http://www.yageo.com/exep/pages/download/literatures/UPY-C_GEN_24.pdf, Height=0.9mm, Lead Free=Yes, Material=Ceramic, Mouser Description="Multilayer Ceramic Capacitor, CC Series, 1 - F, - 10%, X7R, 16 V, 0603 [1608 Metric]", Octopart=https://octopart.com/cc0603krx7r7bb105-yageo-42271928, RoHS=TRUE, Voltage Rating="16 V"
J1_A J1_B J1_C J1_D J1_E J1_F J1_G J1_H: library part CON_USBC_TH_SMT, "USB-C (USB TYPE-C) USB 3.2 Gen 1 (USB 3.1 Gen 1, Superspeed (USB 3.0)) Receptacle Connector 24 Position Through Hole, Right Angle"
J2 J7: library part CON_FPGA_SMD, "80 Position Connector Header, Outer Shroud Contacts Surface Mount Gold", Package=None, Availability=Unavailable, MF=Samtec, MP=BTE-040-01-F-D-A, Price=None
J3 J4 J5 J6: library part CON_HEADF_2X20, "40 Position Receptacle Connector 0.100\" (2.54mm) Through Hole Gold", Package=None, Availability=Unavailable, MF=Samtec, MP=SSW-120-01-F-D, Price=None
J8: library part CON_HEADM_1X2, "Connector Header Through Hole 2 position 0.100\" (2.54mm)", Color=Black, Flammability Rating="UL94 V-0", Max Current Rating=7.6A, Max Operating Temperature=125°C, Max Voltage Rating (AC)=550V, Min Operating Temperature=-55°C, Package Quantity=1, Connector Type=Header, Contact Finish - Mating=GOLD, Contact Material=Bronze, Contact Mating Length=0.23inch, Contact Plating=Gold, Contact Shape=Square, Contact Type="Male Pin", Depth=2.54mm, Fastening Type=Pull, Gender=Male, Housing Color=Black, Housing Material=Polyester, Insulation Color=Black, Insulation Material=PBT, Length=5.08mm, Mount="Through Hole", Number Of Contacts=2, Number of Positions=2, Number of Rows=1, Orientation=Straight, Packaging=Bulk, Pitch=2.54mm, Radiation Hardening=No, REACH SVHC="No SVHC", RoHS Compliant=Yes, Series=TSW, Termination=Solder
J9: library part CON_HEADM_1X3, "0.025\" SQ Post Header, Through-hole, Vertical, -55 to 125 degC, 2.54 mm Pitch, 3-Pin, Male, RoHS", Manufacturer=Samtec, Temperature Range="-55 to 125 degC", ComponentLink1Description="Manufacturer URL", ComponentLink1URL=http://www.samtec.com, ComponentLink2Description=Datasheet, ComponentLink2URL=http://www.samtec.com/documents/webfiles/pdf/TSW_TH.PDF, ComponentLink3Description="Package Specification", ComponentLink3URL=http://www.samtec.com/documents/webfiles/cpdf/TSW-XXX-XX-XXX-X-XX-XXX-MKT.pdf, DatasheetVersion=F-214, Mounting Technology=Through-hole, Orientation=Vertical, PackageDescription=".025[0.64] SQ. Post Terminal Strip Assembly", PackageReference=TSW-103-07-X-S, PackageVersion="DM, 8/1988", PartNumber=TSW-103-07-F-S, Pitch="2.54 mm", RoHS=True
J10: library part CON_PWR_24V_5A, "Power Barrel Connector Jack 2.00mm ID (0.079\"), 5.50mm OD (0.217\") Through Hole, Right Angle", Package=None, Check_prices=https://www.snapeda.com/parts/PJ-102AH/Same+Sky/view-part/?ref=eda, MF="Same Sky", MP=PJ-102AH, SnapEDA_Link=https://www.snapeda.com/parts/PJ-102AH/Same+Sky/view-part/?ref=snap
R2: library part RES_0R00_0603, "RES SMD 0 OHM JUMPER 1/10W 0603", Manufacturer=Yageo, Manufacturer Part Number=RC0603FR-070RL, Package=RC0603, Power Rating=0.1W, Resistance=0Ω, Temperature="-55°C to +155°C", Temperature Range High=+155°C, Temperature Range Low=-55°C, Tolerance=1%, Voltage Rating=75V, Automotive=No, Category=Res, ComponentLink2Description=Datasheet, ComponentLink2URL=http://www.yageo.com/documents/recent/PYu-RC_Group_51_RoHS_L_10.pdf, Composition="Thick Film", Device Class L1="Passive Components", Device Class L2=Resistors, Device Class L3="Chip SMD Resistors", Digikey Description="RES SMD 0 OHM JUMPER 1/10W 0603", Footprint Url=http://www.yageo.com/exep/pages/download/literatures/PYu-R_Mount_10.pdf, Height=0.55mm, Ipc Land Pattern Name=RESC16080X45, Lead Free=Yes, Mouser Description="RC Series 0603 0.1 W 0 O Jumper Surface Mount Thick Film Chip Resistor", Octopart=https://octopart.com/rc0603fr-070rl-yageo-1180803, RoHS=TRUE, Series=RC_L
R3 R4 R5 R6: library part RES_10K0_0603, "RES 10K OHM 1% 1/10W 0603", Case Code (Imperial)=0603, Case Code (Metric)=1608, Max Operating Temperature=155°C, Max Power Dissipation=100mW, Min Operating Temperature=-55°C, Resistance=10kR, Resistance Tolerance=1%, Resistor Type="Thick Film", Temperature Coefficient=100ppm/°C, Voltage Rating=75V, Voltage Rating (DC)=50V, Case/Package=0603, Construction=Rectangular, Depth=0.8mm, Features="Moisture Resistant", Height=0.45mm, Lead Free="Lead Free", Lead Pitch=0.3mm, Length=1.6mm, Military Standard=Not, Number of Pins=2, Number of Terminations=2, Packaging="Tape and Reel", Power Rating=100mW, RoHS Compliant=Yes, Series=RC, Size Code=0603, Termination=SMD/SMT, Tolerance=1%, Weight=7.1E-05oz, Width=0.8mm
S1: library part SW_DIP_4_SMT, "Dip Switch SPST 4 Position Surface Mount Slide (Standard) Actuator 25mA 24VDC", Package=None, Check_prices=https://www.snapeda.com/parts/DS04-254-2-04BK-SMT-TR/Same+Sky/view-part/?ref=eda, MF="Same Sky", MP=DS04-254-2-04BK-SMT-TR, SnapEDA_Link=https://www.snapeda.com/parts/DS04-254-2-04BK-SMT-TR/Same+Sky/view-part/?ref=snap
U1_A U1_B U1_C U1_D U1_E U1_F U1_G U1_H: library part CMP-04872-000210-1, "IC TRANSCEIVER HALF 4/1 20TSSOP", Case/Package=TSSOP, Max Operating Temperature=85°C, Max Supply Current=35mA, Max Supply Voltage=3.6V, Min Operating Temperature=-40°C, Min Supply Voltage=3V, Operating Supply Voltage=3.3V, Output Voltage=2.4V, Package Quantity=70, Power Dissipation=774mW, Data Rate=125Mbps, Height=1.15mm, Lead Free="Lead Free", Length=6.5mm, Logic Function=Buffer, Mount="Surface Mount", Nominal Supply Current=35mA, Number of Drivers=1, Number of Elements=1, Number of Pins=20, Number of Receivers=4, Number of Transceivers=1, Number of Transmitters=4, Operating Supply Current=35mA, Packaging=Rail/Tube, Propagation Delay=3.8ns, Radiation Hardening=No, REACH SVHC="No SVHC", RoHS Compliant=Yes, Series=65LVDT, Supply Current=35mA, Turn-On Delay Time=3.8ns, Weight=0.002716oz, Width=4.4mm

## Free pads (board coordinates)
  round 196.85 hole 98.43: MH(0,0) MH(0,6000) MH(71.73,2133.86) MH(71.73,3866.14) MH(2788.27,2133.86) MH(2788.27,3866.14) MH(5480,0) MH(5480,6000)

## Via types
v1: diameter 20, hole 8, Top to Bottom, 190 vias
v2: diameter 24, hole 12, Top to Bottom, 154 vias
v3: diameter 32, hole 16, Top to Bottom, 38 vias

## Nets (pads, with @x,y where several pads share a name; then routed paths per layer and width w, separated by ;. In a path a pad name is that pad's centre, name@x,y a point inside that pad or via, vN(x,y) a via of type N, cw(c..) or ccw(c..) an arc to the next point about the centre after c; other vN are vias at no path point)
1V0: J2.04 J2.06 J3.04 J3.06 | length 2011.7
  Top w12: J2.04@1319.96,3665.83 J2.06@1351.46,3665.83 ; v2(1320,3540) J2.04@1319.96,3665.83
  Bottom w12: J3.06@225,4650 J3.04@125,4650 125,4480 1065,3540 v2(1320,3540)
1V8: J2.07 J3.07 | length 1542.4
  Top w12: J3.07@325,4750 380,4695 380,4601.02 821.02,4160 1270,4160 1382.95,4047.05 J2.07@1382.95,3908.82
3V3: C1_A.1 C1_B.1 C1_C.1 C1_D.1 C1_E.1 C1_F.1 C1_G.1 C1_H.1 C2_A.2 C2_B.2 C2_C.2 C2_D.2 C2_E.2 C2_F.2 C2_G.2 C2_H.2 C3_A.1 C3_B.1 C3_C.1 C3_D.1 C3_E.1 C3_F.1 C3_G.1 C3_H.1 C4_A.1 C4_B.1 C4_C.1 C4_D.1 C4_E.1 C4_F.1 C4_G.1 C4_H.1 J1_A.A4 J1_A.A9 J1_A.B4 J1_A.B9 J1_B.A4 J1_B.A9 J1_B.B4 J1_B.B9 J1_C.A4 J1_C.A9 J1_C.B4 J1_C.B9 J1_D.A4 J1_D.A9 J1_D.B4 J1_D.B9 J1_E.A4 J1_E.A9 J1_E.B4 J1_E.B9 J1_F.A4 J1_F.A9 J1_F.B4 J1_F.B9 J1_G.A4 J1_G.A9 J1_G.B4 J1_G.B9 J1_H.A4 J1_H.A9 J1_H.B4 J1_H.B9 J2.09 J2.11 J2.13 J3.09 J3.11 J3.13 J5.02 J5.04 J5.06 J7.02 J7.04 J7.06 R3.2 R4.2 R5.2 R6.2 U1_A.4 U1_A.8 U1_B.4 U1_B.8 U1_C.4 U1_C.8 U1_D.4 U1_D.8 U1_E.4 U1_E.8 U1_F.4 U1_F.8 U1_G.4 U1_G.8 U1_H.4 U1_H.8 | length 5056.5
  Top w10: J1_A.A4@5382.4,510.79 5383.31,511.69 5428.98,511.69 J1_A.B9@5430.04,512.76 ; J1_A.A9@5382.4,609.21 5383.31,608.31 5428.98,608.31 J1_A.B4@5430.04,607.24 ; J1_B.A4@5383.31,1211.69 J1_B.B9@5428.98,1211.69 ; J1_B.A9@5383.31,1308.31 J1_B.B4@5428.98,1308.31 ; J1_C.A4@5383.31,1911.69 J1_C.B9@5428.98,1911.69 ; J1_C.A9@5383.31,2008.31 J1_C.B4@5428.98,2008.31 ; J1_D.A4@5383.31,2611.69 J1_D.B9@5428.98,2611.69 ; J1_D.A9@5383.31,2708.31 J1_D.B4@5428.98,2708.31 ; J1_E.A4@5383.31,3311.69 J1_E.B9@5428.98,3311.69 ; J1_E.A9@5383.31,3408.31 J1_E.B4@5428.98,3408.31 ; J1_F.A4@5383.31,4011.69 J1_F.B9@5428.98,4011.69 ; J1_F.A9@5383.31,4108.31 J1_F.B4@5428.98,4108.31 ; J1_G.A4@5383.31,4711.69 J1_G.B9@5428.98,4711.69 ; J1_G.A9@5383.31,4808.31 J1_G.B4@5428.98,4808.31 ; J1_H.A4@5383.31,5411.69 J1_H.B9@5428.98,5411.69 ; J1_H.A9@5383.31,5508.31 J1_H.B4@5428.98,5508.31
  Top w12: J2.09@1414.45,3908.82 v2(1414.45,4003.07) ; J2.11@1445.95,3908.82 v2(1445.95,4040) ; J2.13@1477.44,3908.82 v2(1477.44,4003.07) ; v2(2500,5818.18) 2500.51,5818.69 2627.31,5818.69 R6.2@2627.82,5819.19 ; v2(2510,4988.04) R3.2@2627.82,4988.04 ; R4.2@2757.82,4987.02 v2(2870,4987.02) ; R5.2@2757.82,5818.18 2759.07,5819.43 2898.75,5819.43 v2(2900,5820.68) ; v2(4630,690) C2_A.2@4630,767.44 ; v2(4630,1390) C2_B.2@4630,1467.44 ; v2(4630,2090) C2_C.2@4630,2167.44 ; v2(4630,2790) C2_D.2@4630,2867.44 ; v2(4630,3490) C2_E.2@4630,3567.44 ; v2(4630,4191.21) C2_F.2@4630,4267.44 ; v2(4630,4890) C2_G.2@4630,4967.44 ; v2(4630,5590) C2_H.2@4630,5667.44 ; C1_A.1@4790,773.35 4793.35,770 v2(4880,770) ; C1_B.1@4790,1473.35 4793.35,1470 v2(4880,1470) ; C1_C.1@4790,2173.35 4793.35,2170 v2(4880,2170) ; C1_D.1@4790,2873.35 4793.35,2870 v2(4880,2870) ; C1_E.1@4790,3573.35 4793.35,3570 v2(4880,3570) ; C1_F.1@4790,4273.35 4793.35,4270 v2(4880,4270) ; C1_G.1@4790,4973.35 4793.35,4970 v2(4880,4970) ; C1_H.1@4790,5673.35 4793.35,5670 v2(4880,5670) ; U1_A.4@4929.27,467.73 v2(4988.68,467.73) ; U1_A.8@4929.27,570.09 4929.54,569.82 4988.68,569.82 v2(4990,568.5) ; U1_B.4@4929.27,1167.73 v2(4988.68,1167.73) ; U1_B.8@4929.27,1270.09 4929.54,1269.82 4988.68,1269.82 v2(4990,1268.5) ; U1_C.4@4929.27,1867.73 v2(4988.68,1867.73) ; U1_C.8@4929.27,1970.09 4929.54,1969.82 4988.68,1969.82 v2(4990,1968.5) ; U1_D.4@4929.27,2567.73 v2(4988.68,2567.73) ; U1_D.8@4929.27,2670.09 4929.54,2669.82 4988.68,2669.82 v2(4990,2668.5) ; U1_E.4@4929.27,3267.73 v2(4988.68,3267.73) ; U1_E.8@4929.27,3370.09 4929.54,3369.82 4988.68,3369.82 v2(4990,3368.5) ; U1_F.4@4929.27,3967.73 v2(4988.68,3967.73) ; U1_F.8@4929.27,4070.09 4929.54,4069.82 4988.68,4069.82 v2(4990,4068.5) ; U1_G.4@4929.27,4667.73 v2(4988.68,4667.73) ; U1_G.8@4929.27,4770.09 4929.54,4769.82 4988.68,4769.82 v2(4990,4768.5) ; U1_H.4@4929.27,5367.73 v2(4988.68,5367.73) ; U1_H.8@4929.27,5470.09 4929.54,5469.82 4988.68,5469.82 v2(4990,5468.5) ; C3_A.1@5409.96,260 5410,259.96 v2(5410,190) ; C3_B.1@5409.96,960 5410,959.96 v2(5410,890) ; C3_C.1@5409.96,1660 5410,1659.96 v2(5410,1590) ; C3_D.1@5409.96,2360 5410,2359.96 v2(5410,2290) ; C3_E.1@5409.96,3060 5410,3059.96 v2(5410,2990) ; C3_F.1@5409.96,3760 5410,3759.96 v2(5410,3690) ; C3_G.1@5409.96,4460 5410,4459.96 v2(5410,4390) ; C3_H.1@5409.96,5160 5410,5159.96 v2(5410,5090) ; C4_A.1@5537.27,260 5537.31,259.96 v2(5537.31,190) ; C4_B.1@5537.27,960 5537.31,959.96 v2(5537.31,890) ; C4_C.1@5537.27,1660 5537.31,1659.96 v2(5537.31,1590) ; C4_D.1@5537.27,2360 5537.31,2359.96 v2(5537.31,2290) ; C4_E.1@5537.27,3060 5537.31,3059.96 v2(5537.31,2990) ; C4_F.1@5537.27,3760 5537.31,3759.96 v2(5537.31,3690) ; C4_G.1@5537.27,4460 5537.31,4459.96 v2(5537.31,4390) ; C4_H.1@5537.27,5160 5537.31,5159.96 v2(5537.31,5090)
  Top w16: J7.02@1288.46,2091.02 J7.04@1319.96,2091.02 J7.06@1351.46,2091.02
  other v3: 1283.46,1972.99 1325,2015.72
5V0: C5.1 C6.1 C7.1 C8.1 C9.1 J2.01 J2.03 J2.05 J3.01 J3.03 J3.05 J9.2 J10.1 | length 63
  Top w16: J2.01@1288.46,3908.82 J2.03@1319.96,3908.82 J2.05@1351.46,3908.82
board_mode_0: J2.32 J3.32 R3.1 S1.4A | length 2857.3
  Top w8: v2(1760.91,3590) J2.32@1760.91,3665.83 ; v1(2240,5250) 2630.22,5250 S1.4A@2632.62,5247.6 2632.62,5054 R3.1@2627.82,5049.19
  Bottom w8: v2(1760.91,3590) 1760.91,3915.79 1725.85,3950.85 1725.85,4449.15 J3.32@1525,4650 1571.93,4696.93 1571.93,4810 1651.93,4890 1880,4890 v1(2240,5250)
board_mode_1: J2.34 J3.34 R4.1 S1.3A | length 3047.6
  Top w8: v2(1792.4,3550) J2.34@1792.4,3665.83 ; v1(2310,5347.6) S1.3A@2632.62,5347.6 ; S1.3A@2640.49,5347.6 2757.82,5230.28 R4.1@2757.82,5048.18
  Bottom w8: v2(1792.4,3550) 1792.4,3925.2 1760.91,3956.69 1760.91,4514.09 J3.34@1625,4650 1670,4695 1670,4788.51 1731.49,4850 1920,4850 2310,5240 v1(2310,5347.6)
board_mode_2: J2.38 J3.38 R5.1 S1.2A | length 2898
  Top w8: v2(1855.39,3550) J2.38@1855.39,3665.83 ; v1(2400,5447.6) S1.2A@2632.62,5447.6 ; S1.2A@2640.49,5447.6 2757.82,5564.92 R5.1@2757.82,5757.02
  Bottom w8: v2(1855.39,3550) 1855.39,4618.6 1825,4649 J3.38@1825,4650 1870,4695 1870,4770 1920,4820 1993.76,4820 2400,5226.24 v1(2400,5447.6)
board_mode_3: J2.40 J3.40 R6.1 S1.1A | length 2644.1
  Top w8: v2(1886.89,3590) J2.40@1886.89,3665.83 ; v1(2480,5547.6) S1.1A@2632.62,5547.6 2632.62,5753.23 R6.1@2627.82,5758.04
  Bottom w8: v2(1886.89,3590) 1886.89,4611.89 J3.40@1925,4650 2480,5205 v1(2480,5547.6)
C\S\_A: J7.16 U1_A.1 | length 4741.1
  Top w8: J7.16@1508.94,2091.02 1508.94,1901.06 2040,1370 4166.17,1370 4270,1266.17 4270,749.51 v1(4630,389.51) ; U1_A.1@4929.27,390.96 v1(5030,390.96)
  Bottom w8: v1(4630,389.51) 4630.73,390.23 5029.27,390.23 v1(5030,390.96)
C\S\_A_N: J1_A.A3 J1_A.B3 U1_A.19 | length 1489
  Top w6.3: U1_A.19@4710.73,416.55 4732.63,416.55 4739.78,409.4 4796.58,409.4 4885.98,320 5050.05,320 5111.07,381.02 5111.07,446.82 5150.82,486.57 5258.31,486.57 5267.25,495.5 5272.75,495.5 5282.71,485.55 5320.36,485.55 5321.72,486.91 5355.67,486.91 5359.24,490.47 5381.77,490.47 J1_A.A3@5382.4,491.1
  Bottom w6.3: v1(5270.82,495.5) 5272.84,495.5 5285.59,482.75 5294.64,482.75 5318.7,506.81 5318.7,714.68 5385.32,781.3 5474.68,781.3 5511.3,744.68 5511.3,660.74 5483.65,633.09 5472.89,633.09 5462.8,622.99 J1_A.B3@5457.6,622.99
C\S\_A_P: J1_A.A2 J1_A.B2 U1_A.20 | length 1449.3
  Top w6.3: U1_A.20@4710.73,390.96 4732.63,390.96 4739.78,398.1 4791.9,398.1 4881.3,308.7 5054.73,308.7 5122.37,376.34 5122.37,442.14 5155.5,475.26 5258.31,475.26 5268.07,465.51 5273.57,465.51 5282.31,474.24 5325.04,474.24 5326.41,475.61 5355.67,475.61 5359.24,472.05 5381.77,472.05 J1_A.A2@5382.4,471.42
  Bottom w6.3: v1(5270,465.51) 5273.71,465.51 5279.65,471.45 5299.32,471.45 5330,502.13 5330,710 5390,770 5470,770 5500,740 5500,665.42 5478.97,644.39 5472.89,644.39 5462.8,654.49 J1_A.B2@5457.6,654.49
C\S\_B: J7.28 U1_B.1 | length 3947.2
  Top w8: J7.28@1697.91,2091.02 1697.91,1922.09 2130,1490 4229.51,1490 v1(4630,1089.51) ; U1_B.1@4929.27,1090.96 v1(5030,1090.96)
  Bottom w8: v1(4630,1089.51) 4630.73,1090.23 5029.27,1090.23 v1(5030,1090.96)
C\S\_B_N: J1_B.A3 J1_B.B3 U1_B.19 | length 1489
  Top w6.3: U1_B.19@4710.73,1116.55 4732.63,1116.55 4739.78,1109.4 4796.58,1109.4 4885.98,1020 5050.05,1020 5111.07,1081.02 5111.07,1146.82 5150.82,1186.57 5258.31,1186.57 5267.25,1195.5 5272.75,1195.5 5282.71,1185.55 5320.36,1185.55 5321.72,1186.91 5355.67,1186.91 5359.24,1190.47 5381.77,1190.47 J1_B.A3@5382.4,1191.1
  Bottom w6.3: v1(5270.82,1195.5) 5272.84,1195.5 5285.59,1182.75 5294.64,1182.75 5318.7,1206.81 5318.7,1414.68 5385.32,1481.3 5474.68,1481.3 5511.3,1444.68 5511.3,1360.74 5483.65,1333.09 5472.89,1333.09 5462.8,1322.99 J1_B.B3@5457.6,1322.99
C\S\_B_P: J1_B.A2 J1_B.B2 U1_B.20 | length 1449.3
  Top w6.3: U1_B.20@4710.73,1090.96 4732.63,1090.96 4739.78,1098.1 4791.9,1098.1 4881.3,1008.7 5054.73,1008.7 5122.37,1076.34 5122.37,1142.14 5155.5,1175.26 5258.31,1175.26 5268.07,1165.51 5273.57,1165.51 5282.31,1174.24 5325.04,1174.24 5326.41,1175.61 5355.67,1175.61 5359.24,1172.05 5381.77,1172.05 J1_B.A2@5382.4,1171.42
  Bottom w6.3: v1(5270,1165.51) 5273.71,1165.51 5279.65,1171.45 5299.32,1171.45 5330,1202.13 5330,1410 5390,1470 5470,1470 5500,1440 5500,1365.42 5478.97,1344.39 5472.89,1344.39 5462.8,1354.49 J1_B.B2@5457.6,1354.49
C\S\_C: J7.42 U1_C.1 | length 3591.6
  Top w8: J7.42@1918.39,2091.02 1918.39,1911.61 2220,1610 4399.54,1610 4579.05,1789.51 v1(4630,1789.51) ; U1_C.1@4929.27,1790.96 v1(5030,1790.96)
  Bottom w8: v1(4630,1789.51) 4630.73,1790.23 5029.27,1790.23 v1(5030,1790.96)
C\S\_C_N: J1_C.A3 J1_C.B3 U1_C.19 | length 1489
  Top w6.3: U1_C.19@4710.73,1816.55 4732.63,1816.55 4739.78,1809.4 4796.58,1809.4 4885.98,1720 5050.05,1720 5111.07,1781.02 5111.07,1846.82 5150.82,1886.57 5258.31,1886.57 5267.25,1895.5 5272.75,1895.5 5282.71,1885.55 5320.36,1885.55 5321.72,1886.91 5355.67,1886.91 5359.24,1890.47 5381.77,1890.47 J1_C.A3@5382.4,1891.1
  Bottom w6.3: v1(5270.82,1895.5) 5272.84,1895.5 5285.59,1882.75 5294.64,1882.75 5318.7,1906.81 5318.7,2114.68 5385.32,2181.3 5474.68,2181.3 5511.3,2144.68 5511.3,2060.74 5483.65,2033.09 5472.89,2033.09 5462.8,2022.99 J1_C.B3@5457.6,2022.99
C\S\_C_P: J1_C.A2 J1_C.B2 U1_C.20 | length 1449.3
  Top w6.3: U1_C.20@4710.73,1790.96 4732.63,1790.96 4739.78,1798.1 4791.9,1798.1 4881.3,1708.7 5054.73,1708.7 5122.37,1776.34 5122.37,1842.14 5155.5,1875.26 5258.31,1875.26 5268.07,1865.51 5273.57,1865.51 5282.31,1874.24 5325.04,1874.24 5326.41,1875.61 5355.67,1875.61 5359.24,1872.05 5381.77,1872.05 J1_C.A2@5382.4,1871.42
  Bottom w6.3: v1(5270,1865.51) 5273.71,1865.51 5279.65,1871.45 5299.32,1871.45 5330,1902.13 5330,2110 5390,2170 5470,2170 5500,2140 5500,2065.42 5478.97,2044.39 5472.89,2044.39 5462.8,2054.49 J1_C.B2@5457.6,2054.49
C\S\_D: J7.54 U1_D.1 | length 3557.5
  Top w8: J7.54@2107.36,2091.02 2107.36,1972.64 2350,1730 3822.6,1730 4582.1,2489.51 v1(4630,2489.51) ; U1_D.1@4929.27,2490.96 v1(5030,2490.96)
  Bottom w8: v1(4630,2489.51) 4630.73,2490.23 5029.27,2490.23 v1(5030,2490.96)
C\S\_D_N: J1_D.A3 J1_D.B3 U1_D.19 | length 1489
  Top w6.3: U1_D.19@4710.73,2516.55 4732.63,2516.55 4739.78,2509.4 4796.58,2509.4 4885.98,2420 5050.05,2420 5111.07,2481.02 5111.07,2546.82 5150.82,2586.57 5258.31,2586.57 5267.25,2595.5 5272.75,2595.5 5282.71,2585.55 5320.36,2585.55 5321.72,2586.91 5355.67,2586.91 5359.24,2590.47 5381.77,2590.47 J1_D.A3@5382.4,2591.1
  Bottom w6.3: v1(5270.82,2595.5) 5272.84,2595.5 5285.59,2582.75 5294.64,2582.75 5318.7,2606.81 5318.7,2814.68 5385.32,2881.3 5474.68,2881.3 5511.3,2844.68 5511.3,2760.74 5483.65,2733.09 5472.89,2733.09 5462.8,2722.99 J1_D.B3@5457.6,2722.99
C\S\_D_P: J1_D.A2 J1_D.B2 U1_D.20 | length 1449.3
  Top w6.3: U1_D.20@4710.73,2490.96 4732.63,2490.96 4739.78,2498.1 4791.9,2498.1 4881.3,2408.7 5054.73,2408.7 5122.37,2476.34 5122.37,2542.14 5155.5,2575.26 5258.31,2575.26 5268.07,2565.51 5273.57,2565.51 5282.31,2574.24 5325.04,2574.24 5326.41,2575.61 5355.67,2575.61 5359.24,2572.05 5381.77,2572.05 J1_D.A2@5382.4,2571.42
  Bottom w6.3: v1(5270,2565.51) 5273.71,2565.51 5279.65,2571.45 5299.32,2571.45 5330,2602.13 5330,2810 5390,2870 5470,2870 5500,2840 5500,2765.42 5478.97,2744.39 5472.89,2744.39 5462.8,2754.49 J1_D.B2@5457.6,2754.49